# Altium PCB Turbidity V2.PcbDoc
Units mm, origin at the board's own origin, x right, y up, seen from the top; angles counter-clockwise.
Board outline 32 x 24.89 mm, 2 copper layers (Top Layer, Bottom Layer); 12 components, 9 nets, 35 pads, 7 vias.
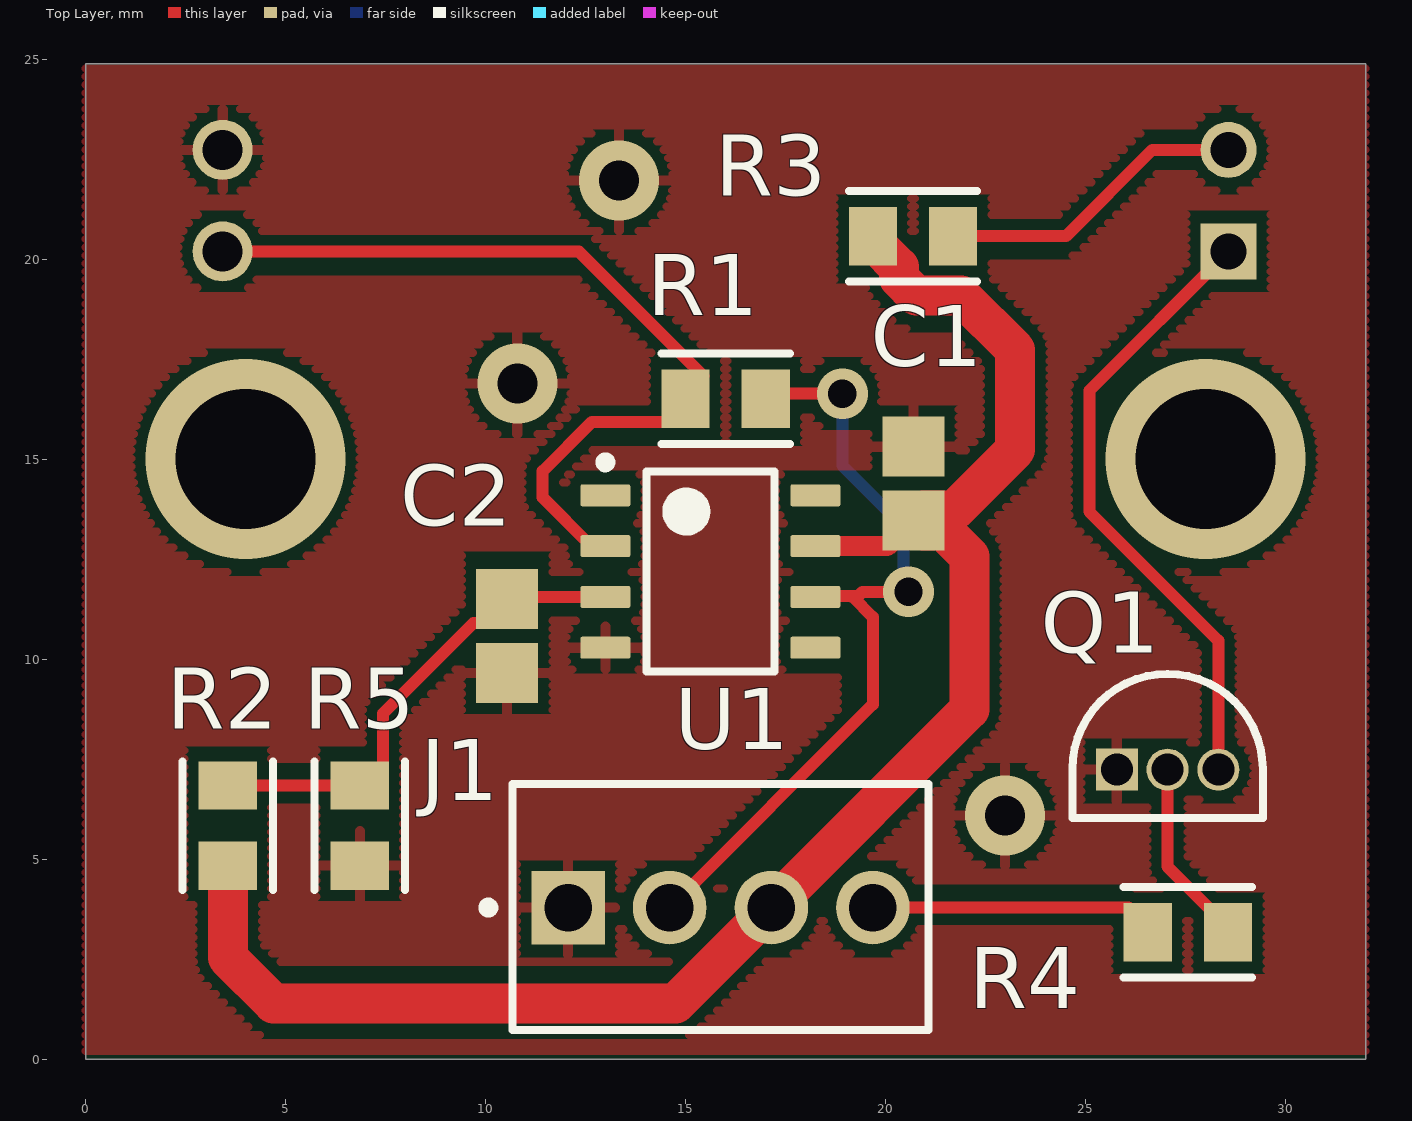
[diagram p0: Top Layer view]
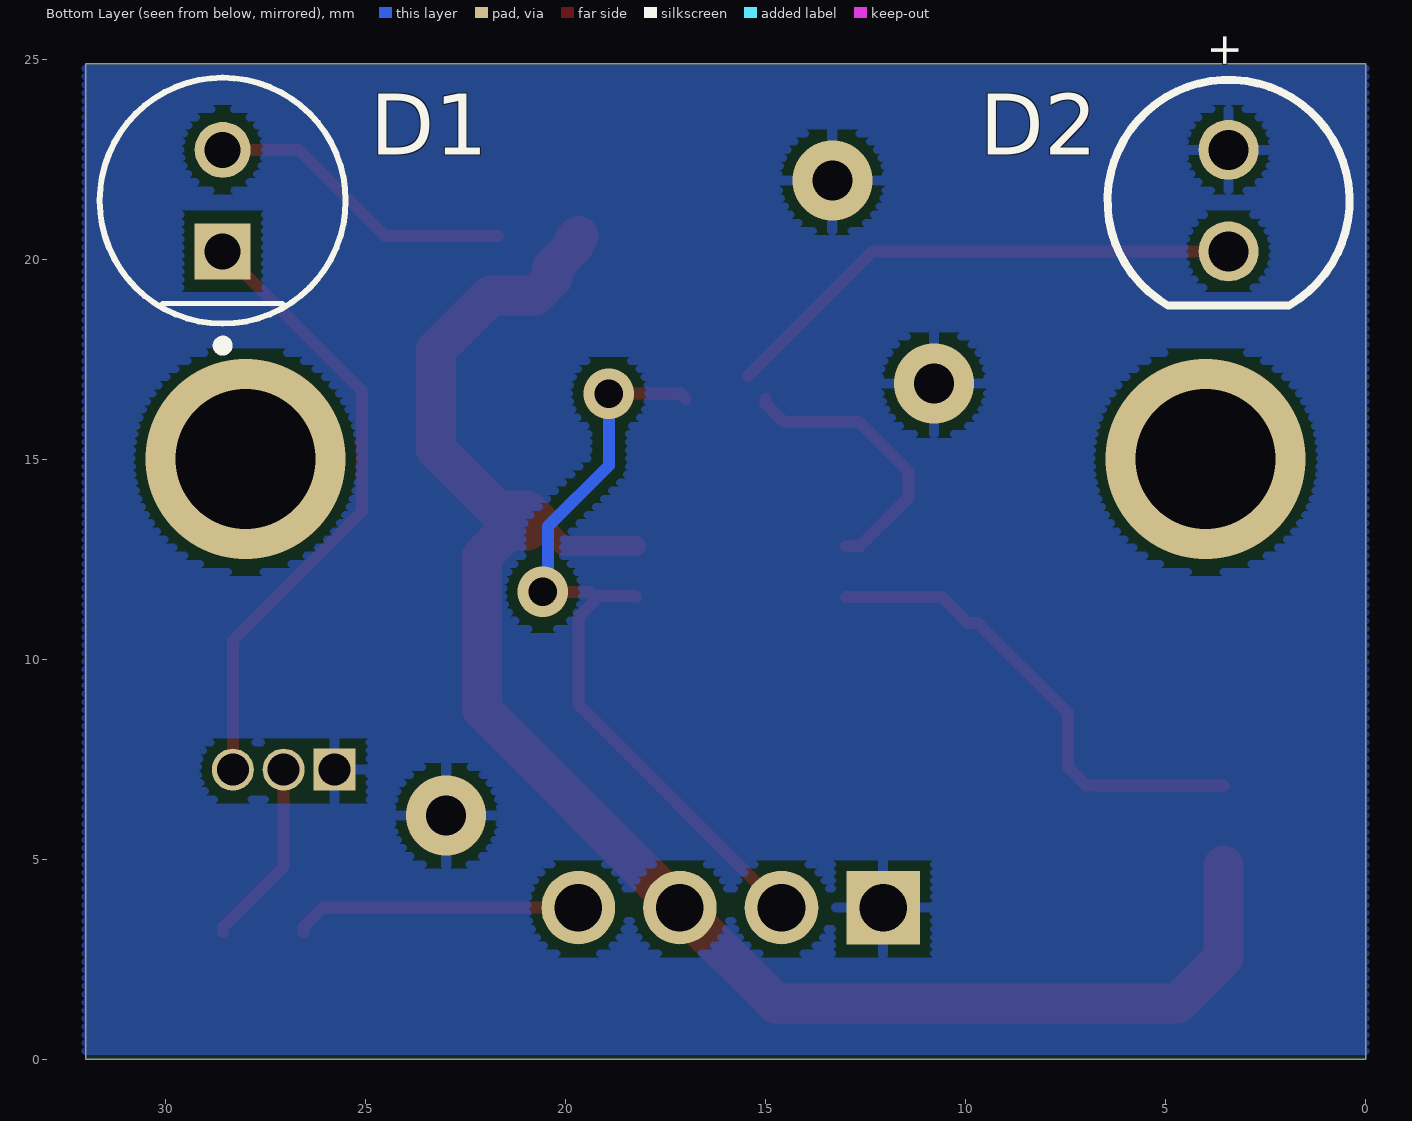
[diagram p1: Bottom Layer view, seen from below]
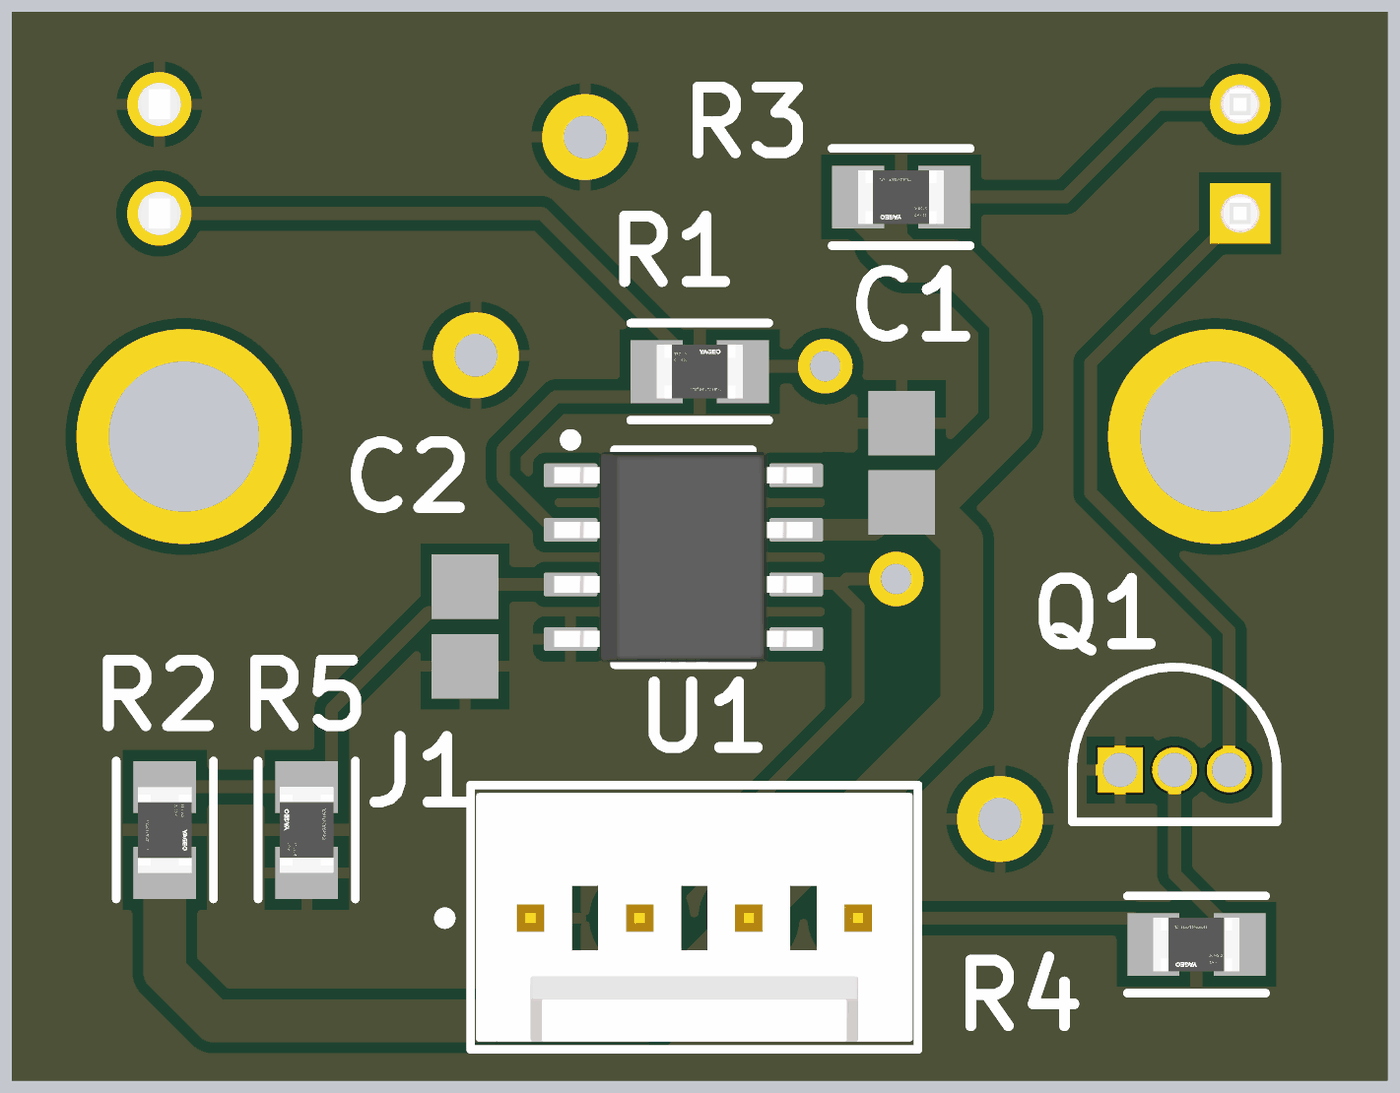
[diagram p2: 3D render of the assembled board from above, using the file's embedded part models]

## Layer stack, top to bottom
Top Solder: solder mask 0.0102, Solder Resist, Dk 3.5
Top Layer: signal copper 0.0356
Dielectric 1: dielectric 0.32, FR-4, Dk 4.8
Bottom Layer: signal copper 0.0356
Bottom Solder: solder mask 0.0102, Solder Resist, Dk 3.5

## Board outline
0,0 32.004,0 32.004,24.892 0,24.892

## Design rules (kind name [scope] priority, off if disabled: settings)
Clearance [All] p1: gap=0.254 ignorepadtopadclearanceinfootprint=FALSE
PolygonConnect [All] p1: connectstyle=Relief reliefconductorwidth=0.254 reliefentries=4 polygonreliefangle="90 Angle" airgapwidth=0.254
RoutingVias [All] p1: holewidth=0.711 width=1.27 viastyle="Through Hole" minholewidth=0.711 minwidth=1.27 maxholewidth=0.711 maxwidth=1.27
SolderMaskExpansion [All] p1: expansion=0 istentingtop=FALSE
SupplyNets "Schematic Supply Nets_1" [InNet('GND')] p1: voltage=0.000
SupplyNets "Schematic Supply Nets" [InNet('+3.3V')] p2: voltage=0.000
Width [All] p1: maxlimit=2 minlimit=0.3 preferedwidth=0.3
30 further rules are at their usual default settings.

## Components (designator, comment, footprint, x,y, rotation, side; value= is the part's Value field where it differs from the comment)
C1 "100nF" CAPC2013X145X48ML20T23 20.701,14.387 r270 top
C2 "100nF" CAPC2013X145X48ML20T23 10.541,10.577 r90 top
D1 "XLUR12D" FP-XLUR12D-MFG 28.575,21.463 r90 bottom
D2 "" WL-TDRW_D5.8H8.7 3.429,21.463 r90 bottom
J1 "" FP-22-29-2041-MFG 15.875,3.81 r180 top
Q1 "2N3904BU" FAIR-TO-92 25.781,7.239 r0 top
R1 "56K" FP-RT0805-IPC_A 16.002,16.51 r0 top value=681Ω
R2 "56K" FP-RT0805-IPC_A 3.556,5.842 r270 top value=681Ω
R3 "75" FP-RT0805-IPC_A 20.687,20.574 r180 top value=681Ω
R4 "10K" FP-RT0805-IPC_A 27.559,3.175 r180 top value=681Ω
R5 "10K" FP-RT0805-IPC_A 6.858,5.842 r90 top value=681Ω
U1 "OPA380AID" D0008A_L 15.621,12.192 r0 top

## Footprints (in the part's own frame and the unit in brackets; to place one, negate y for a bottom-side part, rotate by r counter-clockwise, add the part's x,y. Pads: shape width x height; smd on the part's side, far side on the other; paste and mask are expansions set on the pad)
CAPC2013X145X48ML20T23 [mm] "Chip Capacitor, 2-Leads, Body 2.00x1.25mm, IPC Low Density"
  rect 1.5x1.55 smd: 1(-0.925,0) 2(0.925,0)
  body extent -1.1,-0.72 1.1,0.72, height 1.45
D0008A_L [mm] "SOIC, 8-Leads, Body 5x4mm, Pitch 1.27mm, IPC High Density"
  rrect18% 1.25x0.55 smd: 1(-2.625,1.905) 2(-2.625,0.635) 3(-2.625,-0.635) 4(-2.625,-1.905) 5(2.625,-1.905) 6(2.625,-0.635) 7(2.625,0.635) 8(2.625,1.905)
  silkscreen extent -2.75,-2.5 1.6,2.85, body extent -3,-2.45 3,2.45, height 1.63
FAIR-TO-92 [mm] "TO, 3-Leads, Body Dia 4.79mm, Pitch 1.27mm"
  rect 1.05x1.05 hole 0.8 mask+0.05: 1(0,0)
  round 1.05 hole 0.8 mask+0.05: 2(1.27,0) 3(2.54,0)
  silkscreen extent -1.11,-1.21 3.65,2.4, body extent -1.11,-1.21 3.65,2.4, height 5.33
FP-22-29-2041-MFG [mm]
  rect 1.84x1.84 hole 1.19 paste-2539.97 mask+0: 1(3.81,0.02)
  round 1.84 hole 1.19 paste-2539.97 mask+0: 2(1.27,0.02) 3(-1.27,0.02) 4(-3.81,0.02)
  silkscreen extent -5.21,-3.08 5.93,3.08, body extent -5.31,-3.18 5.31,3.18, height 0.25
FP-RT0805-IPC_A [mm]
  rect 1.208x1.462 smd paste+0 mask+0: 1(-1.002,0) 2(1.002,0)
  silkscreen extent -1.61,-1.13 1.61,1.13, body extent -2.11,-1.23 2.11,1.23, height 0.25
FP-XLUR12D-MFG [mm]
  rect 1.4x1.4 hole 0.9 paste-2539.97 mask+0: 1(-1.27,0)
  round 1.4 hole 0.9 paste-2539.97 mask+0: 2(1.27,0)
  silkscreen extent -3.75,-3.08 3.08,3.08, body extent -2.5,-2.94 2.95,2.94, height 9.85
WL-TDRW_D5.8H8.7 [mm] "THT Phototdiode Round Waterclear, body diameter 5.8mm"
  round 1.5 hole 1: 1(-1.27,0) 2(1.27,0)
  silkscreen extent -2.63,-3.02 3.02,3.02, body extent -2.5,-2.9 2.9,2.9, height 9.2

## Part data
C1 C2: library part CMP-2007-03205-1, Manufacturer=Vitramon, Part Number=VJ0805Y682KXAMT
D1: library part CMP-02085-08376351-1, "627nm Red LED; 5x8.6mm, Through-Hole Mount with Red Diffused Round Lamp", Case/Package=Radial, Color=Red, Forward Voltage=1.9V, Test Current=10mA, Dominant Wavelength=617nm, Height=8.6mm, Lens Color=Red, Lens Transparency=Diffused, Lifecycle Status=Production, Luminous Intensity=39mcd, Mount="Through Hole", RoHS=Compliant, Viewing Angle=30°, Wavelength=627nm
D2: library part CMP-03913-98687784-1, "1540051EA3590 WL-TDRW THT Photodiode Round Waterclear", Max Operating Temperature=85°C, Max Reverse Voltage (DC)=30V, Min Operating Temperature=-40°C, Height=8.7mm, Length=5.8mm, NexarPartId=98687784, RoHS=Compliant, Viewing Angle=35°, Width=5mm
J1: library part CMP-04776-000366-1, "CONN HEADER VERT 4POS 2.54MM", Color=Natural, Contact Resistance=10mR, Current Rating=4A, Flammability Rating="UL94 V-0", Housing Color=White, Insulation Resistance=50GR, Max Operating Temperature=75°C, Min Operating Temperature=0°C, Package Quantity=1500, Voltage Rating=250V, Contact Gender=Male, Contact Material=Brass, Contact Mating Length=0.295inch, Contact Plating=Gold, Contact Type="Male Pin", Depth=5.8mm, Fastening Type=Friction, Gender=Male, Glow Wire Compliant=Non-compliant, Halogen Free="Low Halogen", Height=11.7mm, Housing Material=Nylon, Lead Free="Lead Free", Length=10.16mm, Max Current Rating=4A, Mount="Through Hole", Number of Circuits=4, Number of Contacts=4, Number of Lines=1, Number of Poles=4, Number of Positions=4, Number of Rows=1, Orientation=Straight, Packaging=Bulk, Pitch=2.54mm, Radiation Hardening=No, RoHS Compliant=Yes, Series="KK® 6410", Termination=Solder, Voltage Rating (DC)=250V
Q1: library part CMP-2000-04944-1, "NPN General-Purpose Amplifier, 40 V VCEO, 0.2 A, -55 to 150 degC, 2-Pin TO-92, RoHS, Bulk", Manufacturer=FairchildSemiconductor, Maximum Collector Base Voltage=60V, Maximum Collector Emitter Saturation Voltage=0.2@1mA@10mA, Maximum Collector Emitter Voltage=40V, Maximum DC Collector Current=0.2A, Maximum Operating Frequency=300(Min)MHz, Maximum Power Dissipation=625mW, Minimum DC Current Gain=40@0.1mA@1V, Operating Temperature=-55to150degC, Package=3TO-92, Package Description="3-Pin Transistor Outline Package, Body Dia 4.79 mm, Pitch 1.27 mm", Package Reference=TO-92, Category=GPBJT, Datasheet URL=https://datasheet.ciiva.com/4722/2n3904-82270-4722369.pdf, Datasheet Version="Rev. 1.1.0, 10/2014", Manufacturer URL=https://www.fairchildsemi.com/, Mounting=ThroughHole, Packaging=Bulk, Pin Count=3, Rad Hard=No, Type=NPN
R1 R2 R3 R4 R5: library part CMP-03412-002763-1, "RES SMD 681 OHM 0.1% 1/8W 0805", Manufacturer=Yageo, Manufacturer Part Number=RT0805BRD07681RL, Package=RT0805, Power Rating=0.125W, Resistance=681Ω, Temperature="-55°C to +155°C", Temperature Coefficient="25 ppm/°C", Temperature Range High=+155°C, Temperature Range Low=-55°C, Tolerance=0.0025, Voltage Rating=150V, Automotive=No, Category=Res, ComponentLink2Description=Datasheet, ComponentLink2URL=http://www.yageo.com/documents/recent/PYu-RT_1-to-0.01_RoHS_L_9.pdf, Composition="Thin Film", Device Class L1="Passive Components", Device Class L2=Resistors, Device Class L3="Chip SMD Resistors", Digikey Description="RES SMD 681 OHM 0.1% 1/8W 0805", Footprint Url=http://www.yageo.com/exep/pages/download/literatures/PYu-R_Mount_10.pdf, Height=0.6mm, Ipc Land Pattern Name=RESC200125X50, Lead Free=Yes, Mouser Description="Thin Film Resistors - SMD 1/8W 681 ohm .1% 25ppm", Octopart=https://octopart.com/rt0805brd07681rl-yageo-1270194, RoHS=TRUE, Series=RT
U1: library part CMP-0018-00235-2, "High Speed Precision Transimpedance Amplifier, 2.7 to 5.5 V, -40 to 125 degC, 8-pin SOIC (D8), Green (RoHS & no Sb/Br)", Manufacturer="Texas Instruments", Code_JEDEC=MS-012, ComponentLink1Description="Manufacturer URL", ComponentLink1URL=http://www.ti.com/, ComponentLink2Description=Datasheet, ComponentLink2URL=http://www.ti.com/general/docs/lit/getliterature.tsp?genericPartNumber=OPA380&fileType=pdf, ComponentLink3Description="Package Specification", ComponentLink3URL=http://www.ti.com/litv/pdf/msoi002j, DatasheetVersion=SBOS291G, Eco-Plan="Green (RoHS & no Sb/Br)", Iib(Max)(nA)=0.05, Iq per channel(Max)(mA)=8.8, Mounting Technology="Surface Mount", Number Of Channels=1, PackageDescription="8-Pin Plastic Small Outline, Body 4.9 x 3.9 mm, Pitch 1.27 mm", PackageReference=D0008A, PackageVersion="4040047-3/M, 06/2011", PartNumber=OPA380AID, Slew Rate(Typ)(V/us)=80, Sub Family="High Speed Amplifier (>=50MHz), Low Offset Voltage Amplifier (<=500uV), Low Supply Voltage Amplifier (<=2.7V)", Vio(Max)(mV)=0.025, Vn at Flatband(Typ)(nV/rtHz)=3, Vs(Max)(V)=5.5, Vs(Min)(V)=2.7

## Free pads (board coordinates)
  round 1.524 hole 3.4: 1(28,15) 2(4,15)

## Via types
v1: diameter 2, hole 1, Top Layer to Bottom Layer, 3 vias
v2: diameter 1.27, hole 0.711, Top Layer to Bottom Layer, 2 vias
v3: diameter 5, hole 3.5, Top Layer to Bottom Layer, 2 vias

## Nets (pads, with @x,y where several pads share a name; then routed paths per layer and width w, separated by ;. In a path a pad name is that pad's centre, name@x,y a point inside that pad or via, vN(x,y) a via of type N, cw(c..) or ccw(c..) an arc to the next point about the centre after c; other vN are vias at no path point)
"+0.5V Bias": C2.2 R2.1 R5.2 U1.3 | length 12.1
  Top Layer w0.3: R2.1 R5.2 ; R5.2@6.985,6.844 7.439,7.298 7.439,8.646 9.695,10.902 9.941,10.902 C2.2 10.596,11.557 U1.3
+3.3V: C1.2 J1.3 R2.2 R3.2 U1.7 | length 43.4
  Top Layer w0.5: U1.7 20.041,12.827 C1.2@20.676,13.462
  Top Layer w1: R2.2 3.556,2.54 4.699,1.397 14.752,1.397 J1.3 22.098,8.743 22.098,12.573 21.459,13.212 20.951,13.212 C1.2 20.951,13.712 21.713,13.712 23.241,15.24 23.241,17.731 21.883,19.089 20.773,19.089 20.331,19.531 20.331,19.801 19.789,20.343 19.789,20.47 R3.2
Control: J1.4 R4.2 | length 7.2
  Top Layer w0.3: J1.4 26.069,3.79 26.557,3.302 R4.2
GND: C1.1 C2.1 D2.2 J1.1 Q1.1 R5.1 U1.4
  other v1: 22.987,6.096 10.795,16.891 13.335,21.971
NetD1_1: D1.1 Q1.3 | length 15.7
  Top Layer w0.3: Q1.3 28.321,10.465 25.096,13.69 25.096,16.714 D1.1
NetD1_2: D1.2 R3.1 | length 7.8
  Top Layer w0.3: R3.1 24.511,20.574 26.67,22.733 D1.2
NetD2_1: D2.1 R1.1 U1.2 | length 20.4
  Top Layer w0.3: D2.1 12.333,20.193 R1.1@15.445,17.081 ; U1.2 12.646,12.827 11.43,14.043 11.43,14.699 12.66,15.929 14.546,15.929 15,16.383 R1.1
NetQ1_2: Q1.2 R4.1 | length 4.7
  Top Layer w0.3: Q1.2 27.051,4.812 28.561,3.302 R4.1
Vout: J1.2 R1.2 U1.6 | length 20.1
  Top Layer w0.3: J1.2 19.685,8.87 19.685,11.049 19.177,11.557 ; R1.2 17.131,16.637 v2(18.923,16.637) ; U1.6 18.27,11.581 19.321,11.581 19.424,11.684 v2(20.574,11.684)
  Bottom Layer w0.3: v2(18.923,16.637) 18.923,14.84 20.447,13.316 20.447,11.811 v2(20.574,11.684)
pads on no net: U1.1 U1.5 U1.8
copper on no net:
  other v3: 4,15 28,15

## Polygon pours and split planes (outlines as drawn)
GND on Top Layer "GND_L01_P001" (hatched Horizontal grid 0.203 track 0.203, pour order 1): 0,24.892 32.004,24.892 32.004,0 0,0
GND on Bottom Layer "GND_L02_P000" (hatched Horizontal grid 0.203 track 0.203, pour order 0): 0,24.892 32.004,24.892 32.004,0 0,0

## Other copper
Top Layer:
  pour cut-out: 18.923,14.631 18.923,8.509 16.424,6.01 16.424,4.729 19.08,4.729 21.463,7.112 21.463,14.478 21.59,14.605

## Silkscreen, mask and mechanical layers (free items; w line width, h text height)
Mechanical 1:
  lines w0.254: 0,0 32.131,0 32.131,25.019 0,25.019 0,0

## Text inside footprints (layer, text, board x,y; h text height)
D2: Bottom Overlay "+" at 3.179,24.763 h0.8 r270